# EAGLE board SAMI_panel (EAGLE 9.2.1), part 1 of 3
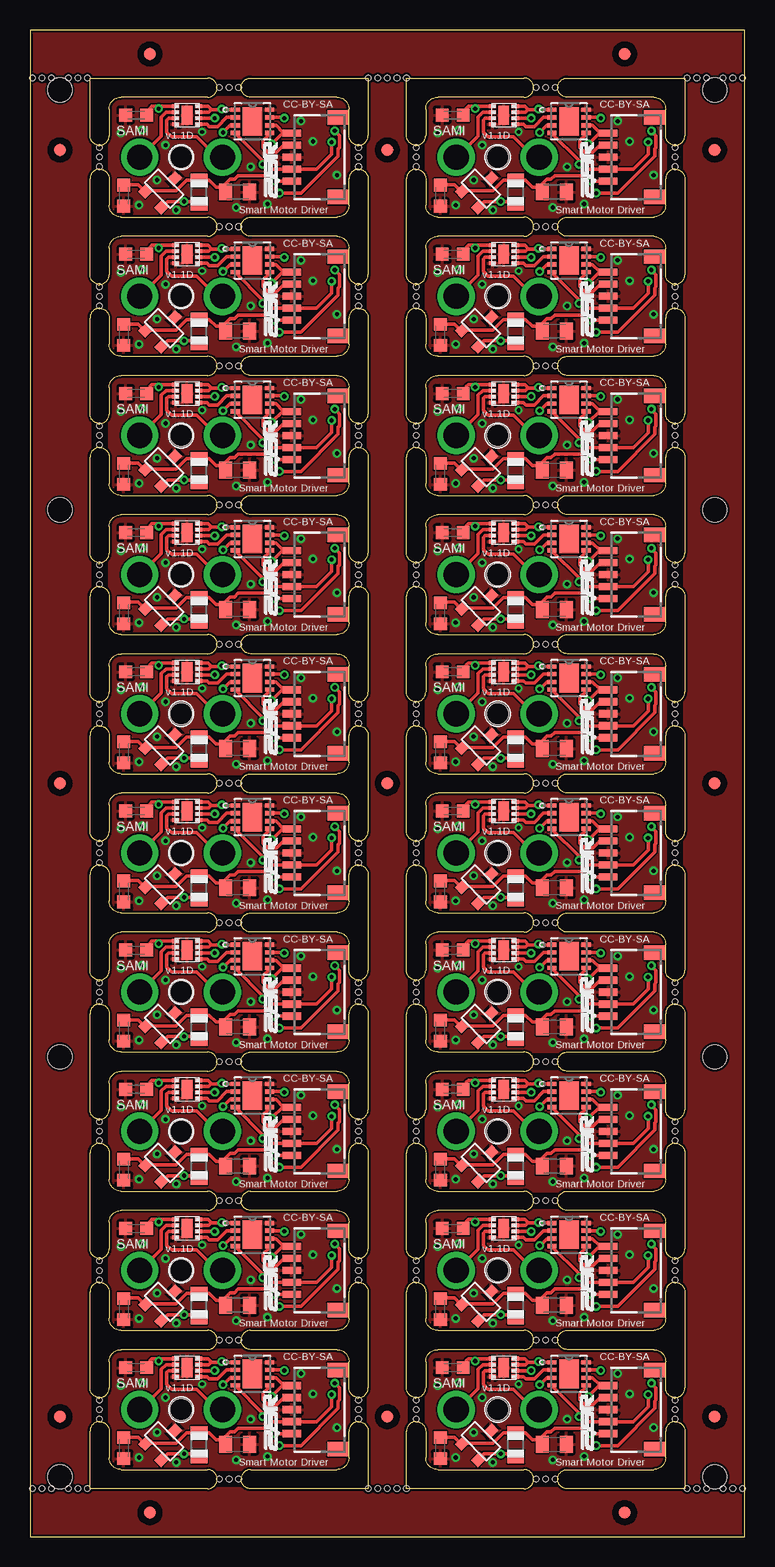
[diagram p0: board, top side]
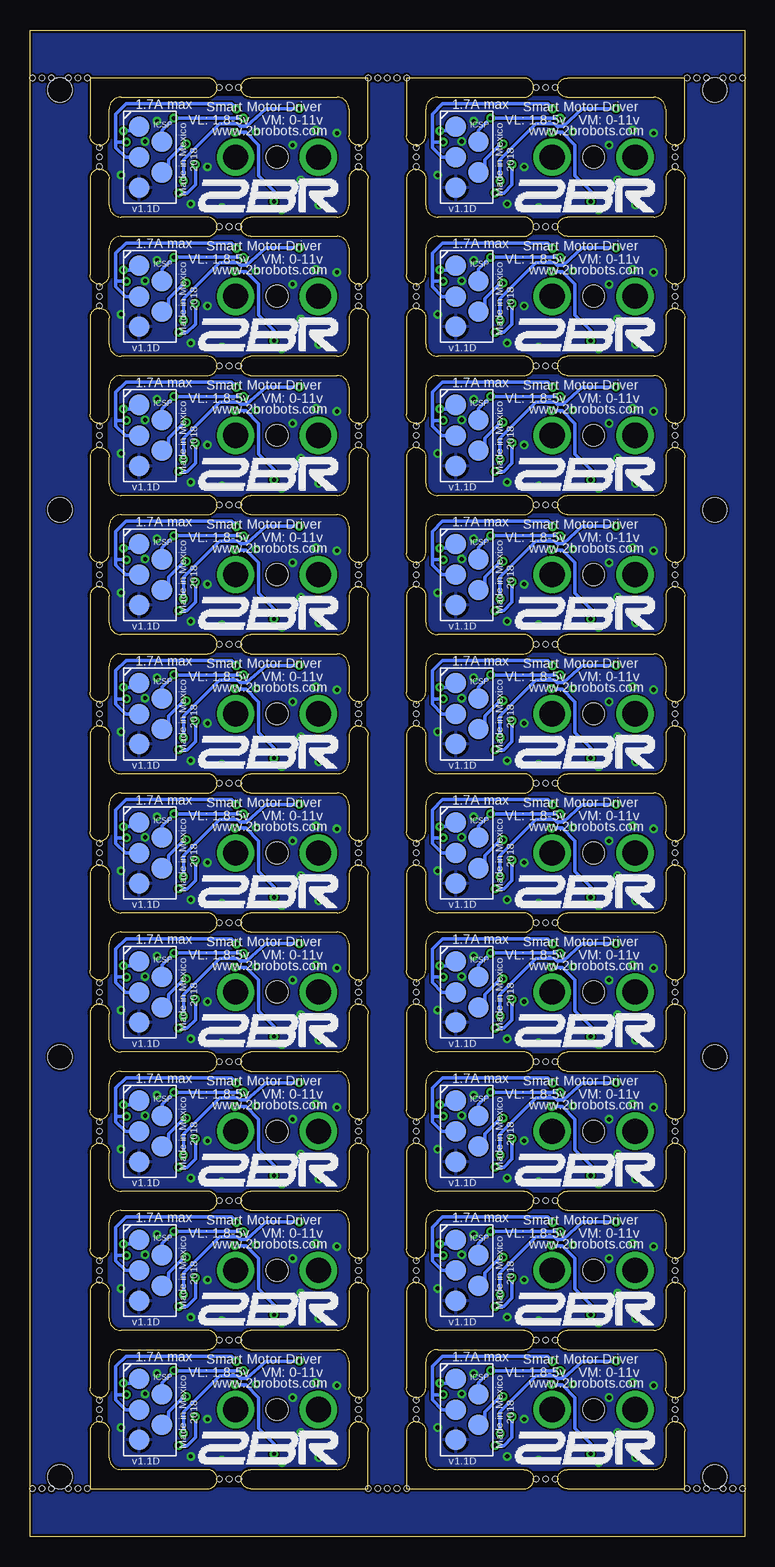
[diagram p1: board, bottom side, seen from below]

Size 59.6 x 125.6 mm. Coordinates in mm from the lower left corner, seen from the top.
Outline: 18.4,15.6 25.6,15.6 arc-90 26.6,14.6 26.6,12.4 arc90 27.4,11.6 arc90 28.2,12.4 28.2,20.4 arc90 27.4,21.2 arc90 26.6,20.4 26.6,18.2 arc-90 25.6,17.2 18.4,17.2
Outline: 18.4,15.6 18.38,15.6
Outline: 18.39,17.2 18.4,17.2
Outline: 18.4,27.2 25.6,27.2 arc-90 26.6,26.2 26.6,24 arc90 27.4,23.2 arc90 28.2,24 28.2,32 arc90 27.4,32.8 arc90 26.6,32 26.6,29.8 arc-90 25.6,28.8 18.4,28.8
Outline: 18.4,27.2 18.36,27.2
Outline: 18.37,28.8 18.4,28.8
Outline: 18.4,38.8 25.6,38.8 arc-90 26.6,37.8 26.6,35.6 arc90 27.4,34.8 arc90 28.2,35.6 28.2,43.6 arc90 27.4,44.4 arc90 26.6,43.6 26.6,41.4 arc-90 25.6,40.4 18.4,40.4 arc90 17.6,39.6 arc90 18.4,38.8
Outline: 18.4,38.8 18.4,38.8
Outline: 18.4,15.6 arc-90 17.6,16.4 arc-90 18.4,17.2
Outline: 18.4,27.2 arc-90 17.6,28 arc-90 18.4,28.8
Outline: 5.8,11.5 5.7,11.5
Outline: 27.4,11.5 27.3,11.5
Outline: 32.2,11.5 32.1,11.5
Outline: 53.8,11.5 53.7,11.5
Outline: 5.8,23.1 5.7,23.1
Outline: 27.4,23.1 27.3,23.1
Outline: 32.2,23.1 32.1,23.1
Outline: 53.8,23.1 53.7,23.1
Outline: 53.8,34.7 53.7,34.7
Outline: 32.2,34.7 32.1,34.7
Outline: 27.4,34.7 27.3,34.7
Outline: 5.8,34.7 5.7,34.7
Outline: 5.8,46.3 5.7,46.3
Outline: 27.4,46.3 27.3,46.3
Outline: 32.2,46.3 32.1,46.3
Outline: 53.8,46.3 53.7,46.3
Outline: 53.8,57.9 53.7,57.9
Outline: 32.2,57.9 32.1,57.9
Outline: 27.4,57.9 27.3,57.9
Outline: 5.8,57.9 5.7,57.9
Outline: 5.8,69.5 5.7,69.5
Outline: 27.4,69.5 27.3,69.5
Outline: 32.2,69.5 32.1,69.5
Outline: 53.8,69.5 53.7,69.5
Outline: 53.8,81.1 53.7,81.1
Outline: 32.2,81.1 32.1,81.1
Outline: 27.4,81.1 27.3,81.1
Outline: 5.8,81.1 5.7,81.1
Outline: 5.8,92.7 5.7,92.7
Outline: 27.4,92.7 27.3,92.7
Outline: 32.2,92.7 32.1,92.7
Outline: 53.8,92.7 53.7,92.7
Outline: 53.8,104.3 53.7,104.3
Outline: 32.2,104.3 32.1,104.3
Outline: 27.4,104.3 27.3,104.3
Outline: 5.8,104.3 5.7,104.3
Outline: 5.8,115.9 5.7,115.9
Outline: 27.4,115.9 27.3,115.9
Outline: 32.2,115.9 32.1,115.9
Outline: 53.8,115.9 53.7,115.9
Outline: 6.6,14.6 6.6,12.4 arc-90 5.8,11.6 arc-90 5,12.4 5,20.4 arc-90 5.8,21.2 arc-90 6.6,20.4 6.6,18.2 arc90 7.6,17.2 14.8,17.2 arc-90 15.6,16.4 arc-90 14.8,15.6 7.6,15.6 arc90 6.6,14.6
Outline: 6.6,8.8 6.6,6.6 arc90 7.6,5.6 14.8,5.6 arc-90 15.6,4.8 arc-90 14.8,4 5,4 5,8.8 arc-90 5.8,9.6 arc-90 6.6,8.8
Outline: 26.6,6.6 arc-90 25.6,5.6 18.4,5.6 arc90 17.6,4.8 arc90 18.4,4 28.2,4 28.2,8.8 arc90 27.4,9.6 arc90 26.6,8.8 26.6,6.6
Outline: 6.6,26.2 arc-90 7.6,27.2 14.8,27.2 arc90 15.6,28 arc90 14.8,28.8 7.6,28.8 arc-90 6.6,29.8 6.6,32 arc90 5.8,32.8 arc90 5,32 5,24 arc90 5.8,23.2 arc90 6.6,24 6.6,26.2
Outline: 6.6,37.8 arc-90 7.6,38.8 14.8,38.8 arc90 15.6,39.6 arc90 14.8,40.4 7.6,40.4 arc-90 6.6,41.4 6.6,43.6 arc90 5.8,44.4 arc90 5,43.6 5,35.6 arc90 5.8,34.8 arc90 6.6,35.6 6.6,37.8
Outline: 6.6,49.4 arc-90 7.6,50.4 14.8,50.4 arc90 15.6,51.2 arc90 14.8,52 7.6,52 arc-90 6.6,53 6.6,55.2 arc90 5.8,56 arc90 5,55.2 5,47.2 arc90 5.8,46.4 arc90 6.6,47.2 6.6,49.4
Outline: 25.6,50.4 arc-90 26.6,49.4 26.6,47.2 arc90 27.4,46.4 arc90 28.2,47.2 28.2,55.2 arc90 27.4,56 arc90 26.6,55.2 26.6,53 arc-90 25.6,52 18.4,52 arc90 17.6,51.2 arc90 18.4,50.4 25.6,50.4
Outline: 6.6,61 arc-90 7.6,62 14.8,62 arc90 15.6,62.8 arc90 14.8,63.6 7.6,63.6 arc-90 6.6,64.6 6.6,66.8 arc90 5.8,67.6 arc90 5,66.8 5,58.8 arc90 5.8,58 arc90 6.6,58.8 6.6,61
Outline: 25.6,62 arc-90 26.6,61 26.6,58.8 arc90 27.4,58 arc90 28.2,58.8 28.2,66.8 arc90 27.4,67.6 arc90 26.6,66.8 26.6,64.6 arc-90 25.6,63.6 18.4,63.6 arc90 17.6,62.8 arc90 18.4,62 25.6,62
Outline: 6.6,72.6 arc-90 7.6,73.6 14.8,73.6 arc90 15.6,74.4 arc90 14.8,75.2 7.6,75.2 arc-90 6.6,76.2 6.6,78.4 arc90 5.8,79.2 arc90 5,78.4 5,70.4 arc90 5.8,69.6 arc90 6.6,70.4 6.6,72.6
Outline: 25.6,73.6 arc-90 26.6,72.6 26.6,70.4 arc90 27.4,69.6 arc90 28.2,70.4 28.2,78.4 arc90 27.4,79.2 arc90 26.6,78.4 26.6,76.2 arc-90 25.6,75.2 18.4,75.2 arc90 17.6,74.4 arc90 18.4,73.6 25.6,73.6
Outline: 6.6,84.2 arc-90 7.6,85.2 14.8,85.2 arc90 15.6,86 arc90 14.8,86.8 7.6,86.8 arc-90 6.6,87.8 6.6,90 arc90 5.8,90.8 arc90 5,90 5,82 arc90 5.8,81.2 arc90 6.6,82 6.6,84.2
Outline: 25.6,85.2 arc-90 26.6,84.2 26.6,82 arc90 27.4,81.2 arc90 28.2,82 28.2,90 arc90 27.4,90.8 arc90 26.6,90 26.6,87.8 arc-90 25.6,86.8 18.4,86.8 arc90 17.6,86 arc90 18.4,85.2 25.6,85.2
Outline: 6.6,95.8 arc-90 7.6,96.8 14.8,96.8 arc90 15.6,97.6 arc90 14.8,98.4 7.6,98.4 arc-90 6.6,99.4 6.6,101.6 arc90 5.8,102.4 arc90 5,101.6 5,93.6 arc90 5.8,92.8 arc90 6.6,93.6 6.6,95.8
Outline: 25.6,96.8 arc-90 26.6,95.8 26.6,93.6 arc90 27.4,92.8 arc90 28.2,93.6 28.2,101.6 arc90 27.4,102.4 arc90 26.6,101.6 26.6,99.4 arc-90 25.6,98.4 18.4,98.4 arc90 17.6,97.6 arc90 18.4,96.8 25.6,96.8
Outline: 6.6,107.4 arc-90 7.6,108.4 14.8,108.4 arc90 15.6,109.2 arc90 14.8,110 7.6,110 arc-90 6.6,111 6.6,113.2 arc90 5.8,114 arc90 5,113.2 5,105.2 arc90 5.8,104.4 arc90 6.6,105.2 6.6,107.4
Outline: 25.6,108.4 arc-90 26.6,107.4 26.6,105.2 arc90 27.4,104.4 arc90 28.2,105.2 28.2,113.2 arc90 27.4,114 arc90 26.6,113.2 26.6,111 arc-90 25.6,110 18.4,110 arc90 17.6,109.2 arc90 18.4,108.4 25.6,108.4
Outline: 6.6,119 arc-90 7.6,120 14.8,120 arc90 15.6,120.8 arc90 14.8,121.6 5,121.6 5,116.8 arc90 5.8,116 arc90 6.6,116.8 6.6,119
Outline: 25.6,120 arc-90 26.6,119 26.6,116.8 arc90 27.4,116 arc90 28.2,116.8 28.2,121.6 18.4,121.6 arc90 17.6,120.8 arc90 18.4,120 25.6,120
Outline: 34,5.6 41.2,5.6 arc-90 42,4.8 arc-90 41.2,4 31.4,4 31.4,8.8 arc-90 32.2,9.6 arc-90 33,8.8 33,6.6 arc90 34,5.6
Outline: 44.8,5.6 52,5.6 arc90 53,6.6 53,8.8 arc-90 53.8,9.6 arc-90 54.6,8.8 54.6,4 44.8,4 arc-90 44,4.8 arc-90 44.8,5.6
Outline: 33,14.6 arc-90 34,15.6 41.2,15.6 arc90 42,16.4 arc90 41.2,17.2 34,17.2 arc-90 33,18.2 33,20.4 arc90 32.2,21.2 arc90 31.4,20.4 31.4,12.4 arc90 32.2,11.6 arc90 33,12.4 33,14.6
Outline: 52,15.6 arc-90 53,14.6 53,12.4 arc90 53.8,11.6 arc90 54.6,12.4 54.6,20.4 arc90 53.8,21.2 arc90 53,20.4 53,18.2 arc-90 52,17.2 44.8,17.2 arc90 44,16.4 arc90 44.8,15.6 52,15.6
Outline: 33,26.2 arc-90 34,27.2 41.2,27.2 arc90 42,28 arc90 41.2,28.8 34,28.8 arc-90 33,29.8 33,32 arc90 32.2,32.8 arc90 31.4,32 31.4,24 arc90 32.2,23.2 arc90 33,24 33,26.2
Outline: 52,27.2 arc-90 53,26.2 53,24 arc90 53.8,23.2 arc90 54.6,24 54.6,32 arc90 53.8,32.8 arc90 53,32 53,29.8 arc-90 52,28.8 44.8,28.8 arc90 44,28 arc90 44.8,27.2 52,27.2
Outline: 33,37.8 arc-90 34,38.8 41.2,38.8 arc90 42,39.6 arc90 41.2,40.4 34,40.4 arc-90 33,41.4 33,43.6 arc90 32.2,44.4 arc90 31.4,43.6 31.4,35.6 arc90 32.2,34.8 arc90 33,35.6 33,37.8
Outline: 52,38.8 arc-90 53,37.8 53,35.6 arc90 53.8,34.8 arc90 54.6,35.6 54.6,43.6 arc90 53.8,44.4 arc90 53,43.6 53,41.4 arc-90 52,40.4 44.8,40.4 arc90 44,39.6 arc90 44.8,38.8 52,38.8
Outline: 33,49.4 arc-90 34,50.4 41.2,50.4 arc90 42,51.2 arc90 41.2,52 34,52 arc-90 33,53 33,55.2 arc90 32.2,56 arc90 31.4,55.2 31.4,47.2 arc90 32.2,46.4 arc90 33,47.2 33,49.4
Outline: 52,50.4 arc-90 53,49.4 53,47.2 arc90 53.8,46.4 arc90 54.6,47.2 54.6,55.2 arc90 53.8,56 arc90 53,55.2 53,53 arc-90 52,52 44.8,52 arc90 44,51.2 arc90 44.8,50.4 52,50.4
Outline: 33,61 arc-90 34,62 41.2,62 arc90 42,62.8 arc90 41.2,63.6 34,63.6 arc-90 33,64.6 33,66.8 arc90 32.2,67.6 arc90 31.4,66.8 31.4,58.8 arc90 32.2,58 arc90 33,58.8 33,61
Outline: 52,62 arc-90 53,61 53,58.8 arc90 53.8,58 arc90 54.6,58.8 54.6,66.8 arc90 53.8,67.6 arc90 53,66.8 53,64.6 arc-90 52,63.6 44.8,63.6 arc90 44,62.8 arc90 44.8,62 52,62
Outline: 33,72.6 arc-90 34,73.6 41.2,73.6 arc90 42,74.4 arc90 41.2,75.2 34,75.2 arc-90 33,76.2 33,78.4 arc90 32.2,79.2 arc90 31.4,78.4 31.4,70.4 arc90 32.2,69.6 arc90 33,70.4 33,72.6
Outline: 52,73.6 arc-90 53,72.6 53,70.4 arc90 53.8,69.6 arc90 54.6,70.4 54.6,78.4 arc90 53.8,79.2 arc90 53,78.4 53,76.2 arc-90 52,75.2 44.8,75.2 arc90 44,74.4 arc90 44.8,73.6 52,73.6
Outline: 33,84.2 arc-90 34,85.2 41.2,85.2 arc90 42,86 arc90 41.2,86.8 34,86.8 arc-90 33,87.8 33,90 arc90 32.2,90.8 arc90 31.4,90 31.4,82 arc90 32.2,81.2 arc90 33,82 33,84.2
Outline: 52,85.2 arc-90 53,84.2 53,82 arc90 53.8,81.2 arc90 54.6,82 54.6,90 arc90 53.8,90.8 arc90 53,90 53,87.8 arc-90 52,86.8 44.8,86.8 arc90 44,86 arc90 44.8,85.2 52,85.2
Outline: 33,95.8 arc-90 34,96.8 41.2,96.8 arc90 42,97.6 arc90 41.2,98.4 34,98.4 arc-90 33,99.4 33,101.6 arc90 32.2,102.4 arc90 31.4,101.6 31.4,93.6 arc90 32.2,92.8 arc90 33,93.6 33,95.8
Outline: 52,96.8 arc-90 53,95.8 53,93.6 arc90 53.8,92.8 arc90 54.6,93.6 54.6,101.6 arc90 53.8,102.4 arc90 53,101.6 53,99.4 arc-90 52,98.4 44.8,98.4 arc90 44,97.6 arc90 44.8,96.8 52,96.8
Outline: 33,107.4 arc-90 34,108.4 41.2,108.4 arc90 42,109.2 arc90 41.2,110 34,110 arc-90 33,111 33,113.2 arc90 32.2,114 arc90 31.4,113.2 31.4,105.2 arc90 32.2,104.4 arc90 33,105.2 33,107.4
Outline: 52,108.4 arc-90 53,107.4 53,105.2 arc90 53.8,104.4 arc90 54.6,105.2 54.6,113.2 arc90 53.8,114 arc90 53,113.2 53,111 arc-90 52,110 44.8,110 arc90 44,109.2 arc90 44.8,108.4 52,108.4
Outline: 33,119 arc-90 34,120 41.2,120 arc90 42,120.8 arc90 41.2,121.6 31.4,121.6 31.4,116.8 arc90 32.2,116 arc90 33,116.8 33,119
Outline: 52,120 arc-90 53,119 53,116.8 arc90 53.8,116 arc90 54.6,116.8 54.6,121.6 44.8,121.6 arc90 44,120.8 arc90 44.8,120 52,120
Outline: 59.6,0 59.6,125.6 0,125.6 0,0 59.6,0
Copper layers (1*16): Top 0.0356mm / dielectric 1.5011mm / Bottom 0.0356mm
Design rules "test-5mil": minimum track width 6mil, minimum drill 0.3mm, track to track 5mil, track to pad 5mil, pad to pad 5mil, via to via 5mil, smd to smd 5mil, copper to edge 8mil, drill to drill 6mil, minimum pad ring 7mil, minimum via ring 7mil, stop-mask expansion 2.5mil, vias tented up to drill 50mil, thermal gap 10mil
Holes 2 mm at 2.5,5 57.1,5 2.5,120.6 57.1,120.6 2.5,40 57.1,40 2.5,85.6 57.1,85.6
Holes 0.45 mm at 42.2,4.8 43,4.8 43.8,4.8 42.2,16.4 43,16.4 43.8,16.4 42.2,28 43,28 43.8,28 42.2,39.6 43,39.6 43.8,39.6 42.2,51.2 43,51.2 43.8,51.2 42.2,62.8 43,62.8 43.8,62.8 42.2,74.4 43,74.4 43.8,74.4 42.2,86 43,86 43.8,86 42.2,97.6 43,97.6 43.8,97.6 42.2,109.2 43,109.2 43.8,109.2 42.2,120.8 43,120.8 43.8,120.8 15.8,4.8 16.6,4.8 17.4,4.8 15.8,16.4 16.6,16.4 17.4,16.4 15.8,28 16.6,28 17.4,28 15.8,39.6 16.6,39.6 17.4,39.6 15.8,51.2 16.6,51.2 17.4,51.2 15.8,62.8 16.6,62.8 17.4,62.8 15.8,74.4 16.6,74.4 17.4,74.4 15.8,86 16.6,86 17.4,86 15.8,97.6 16.6,97.6 17.4,97.6 15.8,109.2 16.6,109.2 17.4,109.2 15.8,120.8 16.6,120.8 17.4,120.8 5.8,9.8 5.8,10.6 5.8,11.4 27.4,9.8 27.4,10.6 27.4,11.4 32.2,9.8 32.2,10.6 32.2,11.4 53.8,9.8 53.8,10.6 53.8,11.4 5.8,21.4 5.8,22.2 5.8,23 27.4,21.4 27.4,22.2 27.4,23 32.2,21.4 32.2,22.2 32.2,23 53.8,21.4 53.8,22.2 53.8,23 53.8,33 53.8,33.8 53.8,34.6 32.2,33 32.2,33.8 32.2,34.6 27.4,33 27.4,33.8 27.4,34.6 5.8,33 5.8,33.8 5.8,34.6 5.8,44.6 5.8,45.4 5.8,46.2 27.4,44.6 27.4,45.4 27.4,46.2 32.2,44.6 32.2,45.4 32.2,46.2 53.8,44.6 53.8,45.4 53.8,46.2 53.8,56.2 53.8,57 53.8,57.8 32.2,56.2 32.2,57 32.2,57.8 27.4,56.2 27.4,57 27.4,57.8 5.8,56.2 5.8,57 5.8,57.8 5.8,67.8 5.8,68.6 5.8,69.4 27.4,67.8 27.4,68.6 27.4,69.4 32.2,67.8 32.2,68.6 32.2,69.4 53.8,67.8 53.8,68.6 53.8,69.4 53.8,79.4 53.8,80.2 53.8,81 32.2,79.4 32.2,80.2 32.2,81 27.4,79.4 27.4,80.2 27.4,81 5.8,79.4 5.8,80.2 5.8,81 5.8,91 5.8,91.8 5.8,92.6 27.4,91 27.4,91.8 27.4,92.6 32.2,91 32.2,91.8 32.2,92.6 53.8,91 53.8,91.8 53.8,92.6 53.8,102.6 53.8,103.4 53.8,104.2 32.2,102.6 32.2,103.4 32.2,104.2 27.4,102.6 27.4,103.4 27.4,104.2 5.8,102.6 5.8,103.4 5.8,104.2 5.8,114.2 5.8,115 5.8,115.8 27.4,114.2 27.4,115 27.4,115.8 32.2,114.2 32.2,115 32.2,115.8 53.8,114.2 53.8,115 53.8,115.8 4.8,4 4,4 3.2,4 1.8,4 1,4 0.2,4 59.4,4 58.6,4 57.8,4 56.4,4 55.6,4 54.8,4 59.4,121.6 58.6,121.6 57.8,121.6 56.4,121.6 55.6,121.6 54.8,121.6 4.8,121.6 4,121.6 3.2,121.6 1.8,121.6 1,121.6 0.2,121.6 31.4,121.6 30.6,121.6 29.8,121.6 29,121.6 28.2,121.6 31.4,4 30.6,4 29.8,4 29,4 28.2,4

## Footprints (pad centres in the part's own frame; a part is rotated, then mirrored left to right if it is on the bottom)
C0603K = smd 1.05 x 1.08: 1 -0.875,0; 2 0.875,0
C0805K = smd 1.1 x 1.4: 1 -1,0; 2 1,0
FIDUCIAL = smd 1 x 1: 1 0,0
SM05B-SRSS-TB(LF)(SN) = smd 0.6 x 1.55: 1 -2,1; 2 -1,1; 3 0,1; 4 1,1; 5 2,1 | smd 1.2 x 1.8: 6 3.3,-2.875; 7 -3.3,-2.875
R0805 = smd 1.1 x 1.4: 1 -1,0; 2 1,0
DFN300X300X100-9N = smd 0.762 x 0.356: 1 -1.422,0.965; 2 -1.422,0.33; 3 -1.422,-0.33; 4 -1.422,-0.965; 5 1.422,-0.965; 6 1.422,-0.33; 7 1.422,0.33; 8 1.422,0.965 | smd 1.6 x 2.388: 9 0,0
ICSP_POGO = smd 1.7 x 1.7: P$1 -2.55,0; P$2 0.01,0; P$3 2.54,0; P$4 -1.275,1.9; P$5 1.275,1.9
DSG = smd 0.6 x 0.35: 1 -0.95,0.75; 2 -0.95,0.25; 3 -0.95,-0.25; 4 -0.95,-0.75; 5 0.95,-0.75; 6 0.95,-0.25; 7 0.95,0.25; 8 0.95,0.75 | smd 0.9 x 1.6: PAD 0,0
SC59 = smd 0.8 x 1: P$1 -0.9,-1.2; P$2 1,-1.2; P$3 0.05,1.2
POLOL-MOTOR-BACK = drill 2.1 pad 2.6: P$1 3.45,0; P$2 -3.45,0 | hole 1.8: 0,0

## Placement (x,y rotation side)
C1  0.1uF  [C0603K]  8.85,14.1 180 top
C2  0.1uF  [C0603K]  7.82,7.39 270 top
C3  4.7uF  [C0805K]  17.32,7.7 0 top
C4  0.1uF  [C0603K]  8.85,25.7 180 top
C5  0.1uF  [C0603K]  7.82,18.99 270 top
C6  4.7uF  [C0805K]  17.32,19.3 0 top
C7  0.1uF  [C0603K]  8.85,37.3 180 top
C8  0.1uF  [C0603K]  7.82,30.59 270 top
C9  4.7uF  [C0805K]  17.32,30.9 0 top
C10  0.1uF  [C0603K]  8.85,48.9 180 top
C11  0.1uF  [C0603K]  7.82,42.19 270 top
C12  4.7uF  [C0805K]  17.32,42.5 0 top
C13  0.1uF  [C0603K]  8.85,60.5 180 top
C14  0.1uF  [C0603K]  7.82,53.79 270 top
C15  4.7uF  [C0805K]  17.32,54.1 0 top
C16  0.1uF  [C0603K]  8.85,72.1 180 top
C17  0.1uF  [C0603K]  7.82,65.39 270 top
C18  4.7uF  [C0805K]  17.32,65.7 0 top
C19  0.1uF  [C0603K]  8.85,83.7 180 top
C20  0.1uF  [C0603K]  7.82,76.99 270 top
C21  4.7uF  [C0805K]  17.32,77.3 0 top
C22  0.1uF  [C0603K]  8.85,95.3 180 top
C23  0.1uF  [C0603K]  7.82,88.59 270 top
C24  4.7uF  [C0805K]  17.32,88.9 0 top
C25  0.1uF  [C0603K]  8.85,106.9 180 top
C26  0.1uF  [C0603K]  7.82,100.19 270 top
C27  4.7uF  [C0805K]  17.32,100.5 0 top
C28  0.1uF  [C0603K]  8.85,118.5 180 top
C29  0.1uF  [C0603K]  7.82,111.79 270 top
C30  4.7uF  [C0805K]  17.32,112.1 0 top
C31  0.1uF  [C0603K]  35.25,14.1 180 top
C32  0.1uF  [C0603K]  34.22,7.39 270 top
C33  4.7uF  [C0805K]  43.72,7.7 0 top
C34  0.1uF  [C0603K]  35.25,25.7 180 top
C35  0.1uF  [C0603K]  34.22,18.99 270 top
C36  4.7uF  [C0805K]  43.72,19.3 0 top
C37  0.1uF  [C0603K]  35.25,37.3 180 top
C38  0.1uF  [C0603K]  34.22,30.59 270 top
C39  4.7uF  [C0805K]  43.72,30.9 0 top
C40  0.1uF  [C0603K]  35.25,48.9 180 top
C41  0.1uF  [C0603K]  34.22,42.19 270 top
C42  4.7uF  [C0805K]  43.72,42.5 0 top
C43  0.1uF  [C0603K]  35.25,60.5 180 top
C44  0.1uF  [C0603K]  34.22,53.79 270 top
C45  4.7uF  [C0805K]  43.72,54.1 0 top
C46  0.1uF  [C0603K]  35.25,72.1 180 top
C47  0.1uF  [C0603K]  34.22,65.39 270 top
C48  4.7uF  [C0805K]  43.72,65.7 0 top
C49  0.1uF  [C0603K]  35.25,83.7 180 top
C50  0.1uF  [C0603K]  34.22,76.99 270 top
C51  4.7uF  [C0805K]  43.72,77.3 0 top
C52  0.1uF  [C0603K]  35.25,95.3 180 top
C53  0.1uF  [C0603K]  34.22,88.59 270 top
C54  4.7uF  [C0805K]  43.72,88.9 0 top
C55  0.1uF  [C0603K]  35.25,106.9 180 top
C56  0.1uF  [C0603K]  34.22,100.19 270 top
C57  4.7uF  [C0805K]  43.72,100.5 0 top
C58  0.1uF  [C0603K]  35.25,118.5 180 top
C59  0.1uF  [C0603K]  34.22,111.79 270 top
C60  4.7uF  [C0805K]  43.72,112.1 0 top
E$1  [FIDUCIAL]  2.5,10 0 top
E$2  [FIDUCIAL]  57.1,10 0 top
E$3  [FIDUCIAL]  2.5,115.6 0 top
E$4  [FIDUCIAL]  57.1,115.6 0 top
E$5  [FIDUCIAL]  29.8,10 0 top
E$6  [FIDUCIAL]  29.8,62.8 0 top
E$7  [FIDUCIAL]  29.8,115.6 0 top
E$8  [FIDUCIAL]  2.5,62.8 0 top
E$9  [FIDUCIAL]  57.1,62.8 0 top
E$10  [FIDUCIAL]  10,2 0 top
E$11  [FIDUCIAL]  49.6,2 0 top
E$12  [FIDUCIAL]  10,123.6 0 top
E$13  [FIDUCIAL]  49.6,123.6 0 top
J1  SM05B-SRSS-TB(LF)(SN)  [SM05B-SRSS-TB(LF)(SN)]  22.82,10.6 90 top
J2  SM05B-SRSS-TB(LF)(SN)  [SM05B-SRSS-TB(LF)(SN)]  22.82,22.2 90 top
J3  SM05B-SRSS-TB(LF)(SN)  [SM05B-SRSS-TB(LF)(SN)]  22.82,33.8 90 top
J4  SM05B-SRSS-TB(LF)(SN)  [SM05B-SRSS-TB(LF)(SN)]  22.82,45.4 90 top
J5  SM05B-SRSS-TB(LF)(SN)  [SM05B-SRSS-TB(LF)(SN)]  22.82,57 90 top
J6  SM05B-SRSS-TB(LF)(SN)  [SM05B-SRSS-TB(LF)(SN)]  22.82,68.6 90 top
J7  SM05B-SRSS-TB(LF)(SN)  [SM05B-SRSS-TB(LF)(SN)]  22.82,80.2 90 top
J8  SM05B-SRSS-TB(LF)(SN)  [SM05B-SRSS-TB(LF)(SN)]  22.82,91.8 90 top
J9  SM05B-SRSS-TB(LF)(SN)  [SM05B-SRSS-TB(LF)(SN)]  22.82,103.4 90 top
J10  SM05B-SRSS-TB(LF)(SN)  [SM05B-SRSS-TB(LF)(SN)]  22.82,115 90 top
J11  SM05B-SRSS-TB(LF)(SN)  [SM05B-SRSS-TB(LF)(SN)]  49.22,10.6 90 top
J12  SM05B-SRSS-TB(LF)(SN)  [SM05B-SRSS-TB(LF)(SN)]  49.22,22.2 90 top
J13  SM05B-SRSS-TB(LF)(SN)  [SM05B-SRSS-TB(LF)(SN)]  49.22,33.8 90 top
J14  SM05B-SRSS-TB(LF)(SN)  [SM05B-SRSS-TB(LF)(SN)]  49.22,45.4 90 top
J15  SM05B-SRSS-TB(LF)(SN)  [SM05B-SRSS-TB(LF)(SN)]  49.22,57 90 top
J16  SM05B-SRSS-TB(LF)(SN)  [SM05B-SRSS-TB(LF)(SN)]  49.22,68.6 90 top
J17  SM05B-SRSS-TB(LF)(SN)  [SM05B-SRSS-TB(LF)(SN)]  49.22,80.2 90 top
J18  SM05B-SRSS-TB(LF)(SN)  [SM05B-SRSS-TB(LF)(SN)]  49.22,91.8 90 top
J19  SM05B-SRSS-TB(LF)(SN)  [SM05B-SRSS-TB(LF)(SN)]  49.22,103.4 90 top
J20  SM05B-SRSS-TB(LF)(SN)  [SM05B-SRSS-TB(LF)(SN)]  49.22,115 90 top
R1  10k  [R0805]  14.1,7.67 90 top
R2  10k  [R0805]  14.1,19.27 90 top
R3  10k  [R0805]  14.1,30.87 90 top
R4  10k  [R0805]  14.1,42.47 90 top
R5  10k  [R0805]  14.1,54.07 90 top
R6  10k  [R0805]  14.1,65.67 90 top
R7  10k  [R0805]  14.1,77.27 90 top
R8  10k  [R0805]  14.1,88.87 90 top
R9  10k  [R0805]  14.1,100.47 90 top
R10  10k  [R0805]  14.1,112.07 90 top
R11  10k  [R0805]  40.5,7.67 90 top
R12  10k  [R0805]  40.5,19.27 90 top
R13  10k  [R0805]  40.5,30.87 90 top
R14  10k  [R0805]  40.5,42.47 90 top
R15  10k  [R0805]  40.5,54.07 90 top
R16  10k  [R0805]  40.5,65.67 90 top
R17  10k  [R0805]  40.5,77.27 90 top
R18  10k  [R0805]  40.5,88.87 90 top
R19  10k  [R0805]  40.5,100.47 90 top
R20  10k  [R0805]  40.5,112.07 90 top
U1  PIC12F1822-I/MF  [DFN300X300X100-9N]  18.55,13.58 0 top
U2  PIC12F1822-I/MF  [DFN300X300X100-9N]  18.55,25.18 0 top
U3  PIC12F1822-I/MF  [DFN300X300X100-9N]  18.55,36.78 0 top
U4  PIC12F1822-I/MF  [DFN300X300X100-9N]  18.55,48.38 0 top
U5  PIC12F1822-I/MF  [DFN300X300X100-9N]  18.55,59.98 0 top
U6  PIC12F1822-I/MF  [DFN300X300X100-9N]  18.55,71.58 0 top
U7  PIC12F1822-I/MF  [DFN300X300X100-9N]  18.55,83.18 0 top
U8  PIC12F1822-I/MF  [DFN300X300X100-9N]  18.55,94.78 0 top
U9  PIC12F1822-I/MF  [DFN300X300X100-9N]  18.55,106.38 0 top
U10  PIC12F1822-I/MF  [DFN300X300X100-9N]  18.55,117.98 0 top
U11  PIC12F1822-I/MF  [DFN300X300X100-9N]  44.95,13.58 0 top
U12  PIC12F1822-I/MF  [DFN300X300X100-9N]  44.95,25.18 0 top
U13  PIC12F1822-I/MF  [DFN300X300X100-9N]  44.95,36.78 0 top
U14  PIC12F1822-I/MF  [DFN300X300X100-9N]  44.95,48.38 0 top
U15  PIC12F1822-I/MF  [DFN300X300X100-9N]  44.95,59.98 0 top
U16  PIC12F1822-I/MF  [DFN300X300X100-9N]  44.95,71.58 0 top
U17  PIC12F1822-I/MF  [DFN300X300X100-9N]  44.95,83.18 0 top
U18  PIC12F1822-I/MF  [DFN300X300X100-9N]  44.95,94.78 0 top
U19  PIC12F1822-I/MF  [DFN300X300X100-9N]  44.95,106.38 0 top
U20  PIC12F1822-I/MF  [DFN300X300X100-9N]  44.95,117.98 0 top
U$1  ICSP_POGO  [ICSP_POGO]  24.1,10.6 270 bottom
U$2  ICSP_POGO  [ICSP_POGO]  24.1,22.2 270 bottom
U$3  DRV8838  [DSG]  13.1,14.1 0 top
U$4  TLE4946-2K  [SC59]  11.15,8 315 top
U$5  POLOLU-MOTOR-BACK  [POLOL-MOTOR-BACK]  12.6,10.6 180 top
U$6  DRV8838  [DSG]  13.1,25.7 0 top
U$7  TLE4946-2K  [SC59]  11.15,19.6 315 top
U$8  POLOLU-MOTOR-BACK  [POLOL-MOTOR-BACK]  12.6,22.2 180 top
U$9  ICSP_POGO  [ICSP_POGO]  24.1,33.8 270 bottom
U$10  DRV8838  [DSG]  13.1,37.3 0 top
U$11  TLE4946-2K  [SC59]  11.15,31.2 315 top
U$12  POLOLU-MOTOR-BACK  [POLOL-MOTOR-BACK]  12.6,33.8 180 top
U$13  ICSP_POGO  [ICSP_POGO]  24.1,45.4 270 bottom
U$14  DRV8838  [DSG]  13.1,48.9 0 top
U$15  TLE4946-2K  [SC59]  11.15,42.8 315 top
U$16  POLOLU-MOTOR-BACK  [POLOL-MOTOR-BACK]  12.6,45.4 180 top
U$17  ICSP_POGO  [ICSP_POGO]  24.1,57 270 bottom
U$18  DRV8838  [DSG]  13.1,60.5 0 top
U$19  TLE4946-2K  [SC59]  11.15,54.4 315 top
U$20  POLOLU-MOTOR-BACK  [POLOL-MOTOR-BACK]  12.6,57 180 top
U$21  ICSP_POGO  [ICSP_POGO]  24.1,68.6 270 bottom
U$22  DRV8838  [DSG]  13.1,72.1 0 top
U$23  TLE4946-2K  [SC59]  11.15,66 315 top
U$24  POLOLU-MOTOR-BACK  [POLOL-MOTOR-BACK]  12.6,68.6 180 top
U$25  ICSP_POGO  [ICSP_POGO]  24.1,80.2 270 bottom
U$26  DRV8838  [DSG]  13.1,83.7 0 top
U$27  TLE4946-2K  [SC59]  11.15,77.6 315 top
U$28  POLOLU-MOTOR-BACK  [POLOL-MOTOR-BACK]  12.6,80.2 180 top
U$29  ICSP_POGO  [ICSP_POGO]  24.1,91.8 270 bottom
U$30  DRV8838  [DSG]  13.1,95.3 0 top
U$31  TLE4946-2K  [SC59]  11.15,89.2 315 top
U$32  POLOLU-MOTOR-BACK  [POLOL-MOTOR-BACK]  12.6,91.8 180 top
U$33  ICSP_POGO  [ICSP_POGO]  24.1,103.4 270 bottom
U$34  DRV8838  [DSG]  13.1,106.9 0 top
U$35  TLE4946-2K  [SC59]  11.15,100.8 315 top
U$36  POLOLU-MOTOR-BACK  [POLOL-MOTOR-BACK]  12.6,103.4 180 top
U$37  ICSP_POGO  [ICSP_POGO]  24.1,115 270 bottom
U$38  DRV8838  [DSG]  13.1,118.5 0 top
U$39  TLE4946-2K  [SC59]  11.15,112.4 315 top
U$40  POLOLU-MOTOR-BACK  [POLOL-MOTOR-BACK]  12.6,115 180 top
U$41  ICSP_POGO  [ICSP_POGO]  50.5,10.6 270 bottom
U$42  DRV8838  [DSG]  39.5,14.1 0 top
U$43  TLE4946-2K  [SC59]  37.55,8 315 top
U$44  POLOLU-MOTOR-BACK  [POLOL-MOTOR-BACK]  39,10.6 180 top
U$45  ICSP_POGO  [ICSP_POGO]  50.5,22.2 270 bottom
U$46  DRV8838  [DSG]  39.5,25.7 0 top
U$47  TLE4946-2K  [SC59]  37.55,19.6 315 top
U$48  POLOLU-MOTOR-BACK  [POLOL-MOTOR-BACK]  39,22.2 180 top
U$49  ICSP_POGO  [ICSP_POGO]  50.5,33.8 270 bottom
U$50  DRV8838  [DSG]  39.5,37.3 0 top
U$51  TLE4946-2K  [SC59]  37.55,31.2 315 top
U$52  POLOLU-MOTOR-BACK  [POLOL-MOTOR-BACK]  39,33.8 180 top
U$53  ICSP_POGO  [ICSP_POGO]  50.5,45.4 270 bottom
U$54  DRV8838  [DSG]  39.5,48.9 0 top
U$55  TLE4946-2K  [SC59]  37.55,42.8 315 top
U$56  POLOLU-MOTOR-BACK  [POLOL-MOTOR-BACK]  39,45.4 180 top
U$57  ICSP_POGO  [ICSP_POGO]  50.5,57 270 bottom
U$58  DRV8838  [DSG]  39.5,60.5 0 top
U$59  TLE4946-2K  [SC59]  37.55,54.4 315 top
U$60  POLOLU-MOTOR-BACK  [POLOL-MOTOR-BACK]  39,57 180 top
U$61  ICSP_POGO  [ICSP_POGO]  50.5,68.6 270 bottom
U$62  DRV8838  [DSG]  39.5,72.1 0 top
U$63  TLE4946-2K  [SC59]  37.55,66 315 top
U$64  POLOLU-MOTOR-BACK  [POLOL-MOTOR-BACK]  39,68.6 180 top
U$65  ICSP_POGO  [ICSP_POGO]  50.5,80.2 270 bottom
U$66  DRV8838  [DSG]  39.5,83.7 0 top
U$67  TLE4946-2K  [SC59]  37.55,77.6 315 top
U$68  POLOLU-MOTOR-BACK  [POLOL-MOTOR-BACK]  39,80.2 180 top
U$69  ICSP_POGO  [ICSP_POGO]  50.5,91.8 270 bottom
U$70  DRV8838  [DSG]  39.5,95.3 0 top
U$71  TLE4946-2K  [SC59]  37.55,89.2 315 top
U$72  POLOLU-MOTOR-BACK  [POLOL-MOTOR-BACK]  39,91.8 180 top
U$73  ICSP_POGO  [ICSP_POGO]  50.5,103.4 270 bottom
U$74  DRV8838  [DSG]  39.5,106.9 0 top
U$75  TLE4946-2K  [SC59]  37.55,100.8 315 top
U$76  POLOLU-MOTOR-BACK  [POLOL-MOTOR-BACK]  39,103.4 180 top
U$77  ICSP_POGO  [ICSP_POGO]  50.5,115 270 bottom
U$78  DRV8838  [DSG]  39.5,118.5 0 top
U$79  TLE4946-2K  [SC59]  37.55,112.4 315 top
U$80  POLOLU-MOTOR-BACK  [POLOL-MOTOR-BACK]  39,115 180 top

## Library data of the parts
C1-C60 R1-R20 = adafruit
E$1-E$13 = FIDUCIAL
J1-J20 = SM05B-SRSS-TB(LF)(SN); DESCRIPTION: czwka SMD, pozioma, 5 pinw; HEIGHT: mm; MANUFACTURER_NAME: JST (JAPAN SOLDERLESS TERMINALS); MANUFACTURER_PART_NUMBER: SM05B-SRSS-TB(LF)(SN); SUPPLIER_NAME: RS
U1-U20 = Microchip-PIC12xxxx; MPN: PIC12F1822-I/MF; OC_FARNELL: 1814913; OC_NEWARK: 63R7787; PACKAGE: DFN-8; SUPPLIER: MICROCHIP
U$1 U$2 U$9 U$13 U$17 U$21 U$25 U$29 U$33 U$37 U$41 U$45 U$49 U$53 U$57 U$61 U$65 U$69 U$73 U$77 = ICSP_POGO
U$3 U$6 U$10 U$14 U$18 U$22 U$26 U$30 U$34 U$38 U$42 U$46 U$50 U$54 U$58 U$62 U$66 U$70 U$74 U$78 = packages(ti)
U$4 U$7 U$11 U$15 U$19 U$23 U$27 U$31 U$35 U$39 U$43 U$47 U$51 U$55 U$59 U$63 U$67 U$71 U$75 U$79 = TLE4946-2K
U$5 U$8 U$12 U$16 U$20 U$24 U$28 U$32 U$36 U$40 U$44 U$48 U$52 U$56 U$60 U$64 U$68 U$72 U$76 U$80 = pololu-motor-back

## Nets
EN: U1.2 U$3.5
EN1: U2.2 U$6.5
EN2: U3.2 U$10.5
EN3: U4.2 U$14.5
EN4: U5.2 U$18.5
EN5: U6.2 U$22.5
EN6: U7.2 U$26.5
EN7: U8.2 U$30.5
EN8: U9.2 U$34.5
EN9: U10.2 U$38.5
EN10: U11.2 U$42.5
EN11: U12.2 U$46.5
EN12: U13.2 U$50.5
EN13: U14.2 U$54.5
EN14: U15.2 U$58.5
EN15: U16.2 U$62.5
EN16: U17.2 U$66.5
EN17: U18.2 U$70.5
EN18: U19.2 U$74.5
EN19: U20.2 U$78.5
GND: C1.2 C2.2 C3.2 J1.3 U1.8 U$1.P$3 U$3.4 U$3.PAD U$4.P$3
GND1: C4.2 C5.2 C6.2 J2.3 U2.8 U$2.P$3 U$6.4 U$6.PAD U$7.P$3
GND2: C7.2 C8.2 C9.2 J3.3 U3.8 U$9.P$3 U$10.4 U$10.PAD U$11.P$3
GND3: C10.2 C11.2 C12.2 J4.3 U4.8 U$13.P$3 U$14.4 U$14.PAD U$15.P$3
GND4: C13.2 C14.2 C15.2 J5.3 U5.8 U$17.P$3 U$18.4 U$18.PAD U$19.P$3
GND5: C16.2 C17.2 C18.2 J6.3 U6.8 U$21.P$3 U$22.4 U$22.PAD U$23.P$3
GND6: C19.2 C20.2 C21.2 J7.3 U7.8 U$25.P$3 U$26.4 U$26.PAD U$27.P$3
GND7: C22.2 C23.2 C24.2 J8.3 U8.8 U$29.P$3 U$30.4 U$30.PAD U$31.P$3
GND8: C25.2 C26.2 C27.2 J9.3 U9.8 U$33.P$3 U$34.4 U$34.PAD U$35.P$3
GND9: C28.2 C29.2 C30.2 J10.3 U10.8 U$37.P$3 U$38.4 U$38.PAD U$39.P$3
GND10: C31.2 C32.2 C33.2 J11.3 U11.8 U$41.P$3 U$42.4 U$42.PAD U$43.P$3
GND11: C34.2 C35.2 C36.2 J12.3 U12.8 U$45.P$3 U$46.4 U$46.PAD U$47.P$3
GND12: C37.2 C38.2 C39.2 J13.3 U13.8 U$49.P$3 U$50.4 U$50.PAD U$51.P$3
GND13: C40.2 C41.2 C42.2 J14.3 U14.8 U$53.P$3 U$54.4 U$54.PAD U$55.P$3
GND14: C43.2 C44.2 C45.2 J15.3 U15.8 U$57.P$3 U$58.4 U$58.PAD U$59.P$3
GND15: C46.2 C47.2 C48.2 J16.3 U16.8 U$61.P$3 U$62.4 U$62.PAD U$63.P$3
GND16: C49.2 C50.2 C51.2 J17.3 U17.8 U$65.P$3 U$66.4 U$66.PAD U$67.P$3
GND17: C52.2 C53.2 C54.2 J18.3 U18.8 U$69.P$3 U$70.4 U$70.PAD U$71.P$3
GND18: C55.2 C56.2 C57.2 J19.3 U19.8 U$73.P$3 U$74.4 U$74.PAD U$75.P$3
GND19: C58.2 C59.2 C60.2 J20.3 U20.8 U$77.P$3 U$78.4 U$78.PAD U$79.P$3
M1: U$3.2 U$5.P$1
M2: U$3.3 U$5.P$2
M3: U$6.3 U$8.P$2
M4: U$6.2 U$8.P$1
M5: U$10.3 U$12.P$2
M6: U$10.2 U$12.P$1
M7: U$14.3 U$16.P$2
M8: U$14.2 U$16.P$1
M9: U$18.3 U$20.P$2
M10: U$18.2 U$20.P$1
M11: U$22.3 U$24.P$2
M12: U$22.2 U$24.P$1
M13: U$26.3 U$28.P$2
M14: U$26.2 U$28.P$1
M15: U$30.3 U$32.P$2
M16: U$30.2 U$32.P$1
M17: U$34.3 U$36.P$2
M18: U$34.2 U$36.P$1
M19: U$38.3 U$40.P$2
M20: U$38.2 U$40.P$1
M21: U$42.3 U$44.P$2
M22: U$42.2 U$44.P$1
M23: U$46.3 U$48.P$2
M24: U$46.2 U$48.P$1
M25: U$50.3 U$52.P$2
M26: U$50.2 U$52.P$1
M27: U$54.3 U$56.P$2
M28: U$54.2 U$56.P$1
M29: U$58.3 U$60.P$2
M30: U$58.2 U$60.P$1
M31: U$62.3 U$64.P$2
M32: U$62.2 U$64.P$1
M33: U$66.3 U$68.P$2
M34: U$66.2 U$68.P$1
M35: U$70.3 U$72.P$2
M36: U$70.2 U$72.P$1
M37: U$74.3 U$76.P$2
M38: U$74.2 U$76.P$1
M39: U$78.3 U$80.P$2
M40: U$78.2 U$80.P$1
PH: U1.7 U$1.P$4 U$3.6
PH1: U2.7 U$2.P$4 U$6.6
PH2: U3.7 U$9.P$4 U$10.6
PH3: U4.7 U$13.P$4 U$14.6
PH4: U5.7 U$17.P$4 U$18.6
PH5: U6.7 U$21.P$4 U$22.6
PH6: U7.7 U$25.P$4 U$26.6
PH7: U8.7 U$29.P$4 U$30.6
PH8: U9.7 U$33.P$4 U$34.6
PH9: U10.7 U$37.P$4 U$38.6
PH10: U11.7 U$41.P$4 U$42.6
PH11: U12.7 U$45.P$4 U$46.6
PH12: U13.7 U$49.P$4 U$50.6
PH13: U14.7 U$53.P$4 U$54.6
PH14: U15.7 U$57.P$4 U$58.6
PH15: U16.7 U$61.P$4 U$62.6
PH16: U17.7 U$65.P$4 U$66.6
PH17: U18.7 U$69.P$4 U$70.6
PH18: U19.7 U$73.P$4 U$74.6
PH19: U20.7 U$77.P$4 U$78.6
Q: R1.1 U1.3 U$4.P$2
Q1: R2.1 U2.3 U$7.P$2
Q2: R3.1 U3.3 U$11.P$2
Q3: R4.1 U4.3 U$15.P$2
Q4: R5.1 U5.3 U$19.P$2
Q5: R6.1 U6.3 U$23.P$2
Q6: R7.1 U7.3 U$27.P$2
Q7: R8.1 U8.3 U$31.P$2
Q8: R9.1 U9.3 U$35.P$2
Q9: R10.1 U10.3 U$39.P$2
Q10: R11.1 U11.3 U$43.P$2
Q11: R12.1 U12.3 U$47.P$2
Q12: R13.1 U13.3 U$51.P$2
Q13: R14.1 U14.3 U$55.P$2
Q14: R15.1 U15.3 U$59.P$2
Q15: R16.1 U16.3 U$63.P$2
Q16: R17.1 U17.3 U$67.P$2
Q17: R18.1 U18.3 U$71.P$2
Q18: R19.1 U19.3 U$75.P$2
Q19: R20.1 U20.3 U$79.P$2
RST: U1.4 U$1.P$1
RST1: U2.4 U$2.P$1
RST2: U3.4 U$9.P$1
RST3: U4.4 U$13.P$1
RST4: U5.4 U$17.P$1
RST5: U6.4 U$21.P$1
RST6: U7.4 U$25.P$1
RST7: U8.4 U$29.P$1
RST8: U9.4 U$33.P$1
RST9: U10.4 U$37.P$1
RST10: U11.4 U$41.P$1
RST11: U12.4 U$45.P$1
RST12: U13.4 U$49.P$1
RST13: U14.4 U$53.P$1
RST14: U15.4 U$57.P$1
RST15: U16.4 U$61.P$1
RST16: U17.4 U$65.P$1
RST17: U18.4 U$69.P$1
RST18: U19.4 U$73.P$1
RST19: U20.4 U$77.P$1
SCL: J1.5 U1.6 U$1.P$5
SCL1: J2.5 U2.6 U$2.P$5
SCL2: J3.5 U3.6 U$9.P$5
SCL3: J4.5 U4.6 U$13.P$5
SCL4: J5.5 U5.6 U$17.P$5
SCL5: J6.5 U6.6 U$21.P$5
SCL6: J7.5 U7.6 U$25.P$5
SCL7: J8.5 U8.6 U$29.P$5
SCL8: J9.5 U9.6 U$33.P$5
SCL9: J10.5 U10.6 U$37.P$5
SCL10: J11.5 U11.6 U$41.P$5
SCL11: J12.5 U12.6 U$45.P$5
SCL12: J13.5 U13.6 U$49.P$5
SCL13: J14.5 U14.6 U$53.P$5
SCL14: J15.5 U15.6 U$57.P$5
SCL15: J16.5 U16.6 U$61.P$5
SCL16: J17.5 U17.6 U$65.P$5
SCL17: J18.5 U18.6 U$69.P$5
SCL18: J19.5 U19.6 U$73.P$5
SCL19: J20.5 U20.6 U$77.P$5
SDA: J1.4 U1.5
SDA1: J2.4 U2.5
SDA2: J3.4 U3.5
SDA3: J4.4 U4.5
SDA4: J5.4 U5.5
SDA5: J6.4 U6.5
SDA6: J7.4 U7.5
SDA7: J8.4 U8.5
SDA8: J9.4 U9.5
SDA9: J10.4 U10.5
SDA10: J11.4 U11.5
SDA11: J12.4 U12.5
SDA12: J13.4 U13.5
SDA13: J14.4 U14.5
SDA14: J15.4 U15.5
SDA15: J16.4 U16.5
SDA16: J17.4 U17.5
SDA17: J18.4 U18.5
SDA18: J19.4 U19.5
SDA19: J20.4 U20.5
VCC: C2.1 C3.1 J1.2 R1.2 U1.1 U$1.P$2 U$3.7 U$3.8 U$4.P$1
VCC1: C5.1 C6.1 J2.2 R2.2 U2.1 U$2.P$2 U$6.7 U$6.8 U$7.P$1
VCC2: C8.1 C9.1 J3.2 R3.2 U3.1 U$9.P$2 U$10.7 U$10.8 U$11.P$1
VCC3: C11.1 C12.1 J4.2 R4.2 U4.1 U$13.P$2 U$14.7 U$14.8 U$15.P$1
VCC4: C14.1 C15.1 J5.2 R5.2 U5.1 U$17.P$2 U$18.7 U$18.8 U$19.P$1
VCC5: C17.1 C18.1 J6.2 R6.2 U6.1 U$21.P$2 U$22.7 U$22.8 U$23.P$1
VCC6: C20.1 C21.1 J7.2 R7.2 U7.1 U$25.P$2 U$26.7 U$26.8 U$27.P$1
VCC7: C23.1 C24.1 J8.2 R8.2 U8.1 U$29.P$2 U$30.7 U$30.8 U$31.P$1
VCC8: C26.1 C27.1 J9.2 R9.2 U9.1 U$33.P$2 U$34.7 U$34.8 U$35.P$1
VCC9: C29.1 C30.1 J10.2 R10.2 U10.1 U$37.P$2 U$38.7 U$38.8 U$39.P$1
VCC10: C32.1 C33.1 J11.2 R11.2 U11.1 U$41.P$2 U$42.7 U$42.8 U$43.P$1
VCC11: C35.1 C36.1 J12.2 R12.2 U12.1 U$45.P$2 U$46.7 U$46.8 U$47.P$1
VCC12: C38.1 C39.1 J13.2 R13.2 U13.1 U$49.P$2 U$50.7 U$50.8 U$51.P$1
VCC13: C41.1 C42.1 J14.2 R14.2 U14.1 U$53.P$2 U$54.7 U$54.8 U$55.P$1
VCC14: C44.1 C45.1 J15.2 R15.2 U15.1 U$57.P$2 U$58.7 U$58.8 U$59.P$1
VCC15: C47.1 C48.1 J16.2 R16.2 U16.1 U$61.P$2 U$62.7 U$62.8 U$63.P$1
VCC16: C50.1 C51.1 J17.2 R17.2 U17.1 U$65.P$2 U$66.7 U$66.8 U$67.P$1
VCC17: C53.1 C54.1 J18.2 R18.2 U18.1 U$69.P$2 U$70.7 U$70.8 U$71.P$1
VCC18: C56.1 C57.1 J19.2 R19.2 U19.1 U$73.P$2 U$74.7 U$74.8 U$75.P$1
VCC19: C59.1 C60.1 J20.2 R20.2 U20.1 U$77.P$2 U$78.7 U$78.8 U$79.P$1
VM: C1.1 J1.1 U$3.1
VM1: C4.1 J2.1 U$6.1
VM2: C7.1 J3.1 U$10.1
VM3: C10.1 J4.1 U$14.1
VM4: C13.1 J5.1 U$18.1
VM5: C16.1 J6.1 U$22.1
VM6: C19.1 J7.1 U$26.1
VM7: C22.1 J8.1 U$30.1
VM8: C25.1 J9.1 U$34.1
VM9: C28.1 J10.1 U$38.1
VM10: C31.1 J11.1 U$42.1
VM11: C34.1 J12.1 U$46.1
VM12: C37.1 J13.1 U$50.1
VM13: C40.1 J14.1 U$54.1
VM14: C43.1 J15.1 U$58.1
VM15: C46.1 J16.1 U$62.1
VM16: C49.1 J17.1 U$66.1
VM17: C52.1 J18.1 U$70.1
VM18: C55.1 J19.1 U$74.1
VM19: C58.1 J20.1 U$78.1